# EAGLE board harp analog input v1.0 (EAGLE 9.6.2)
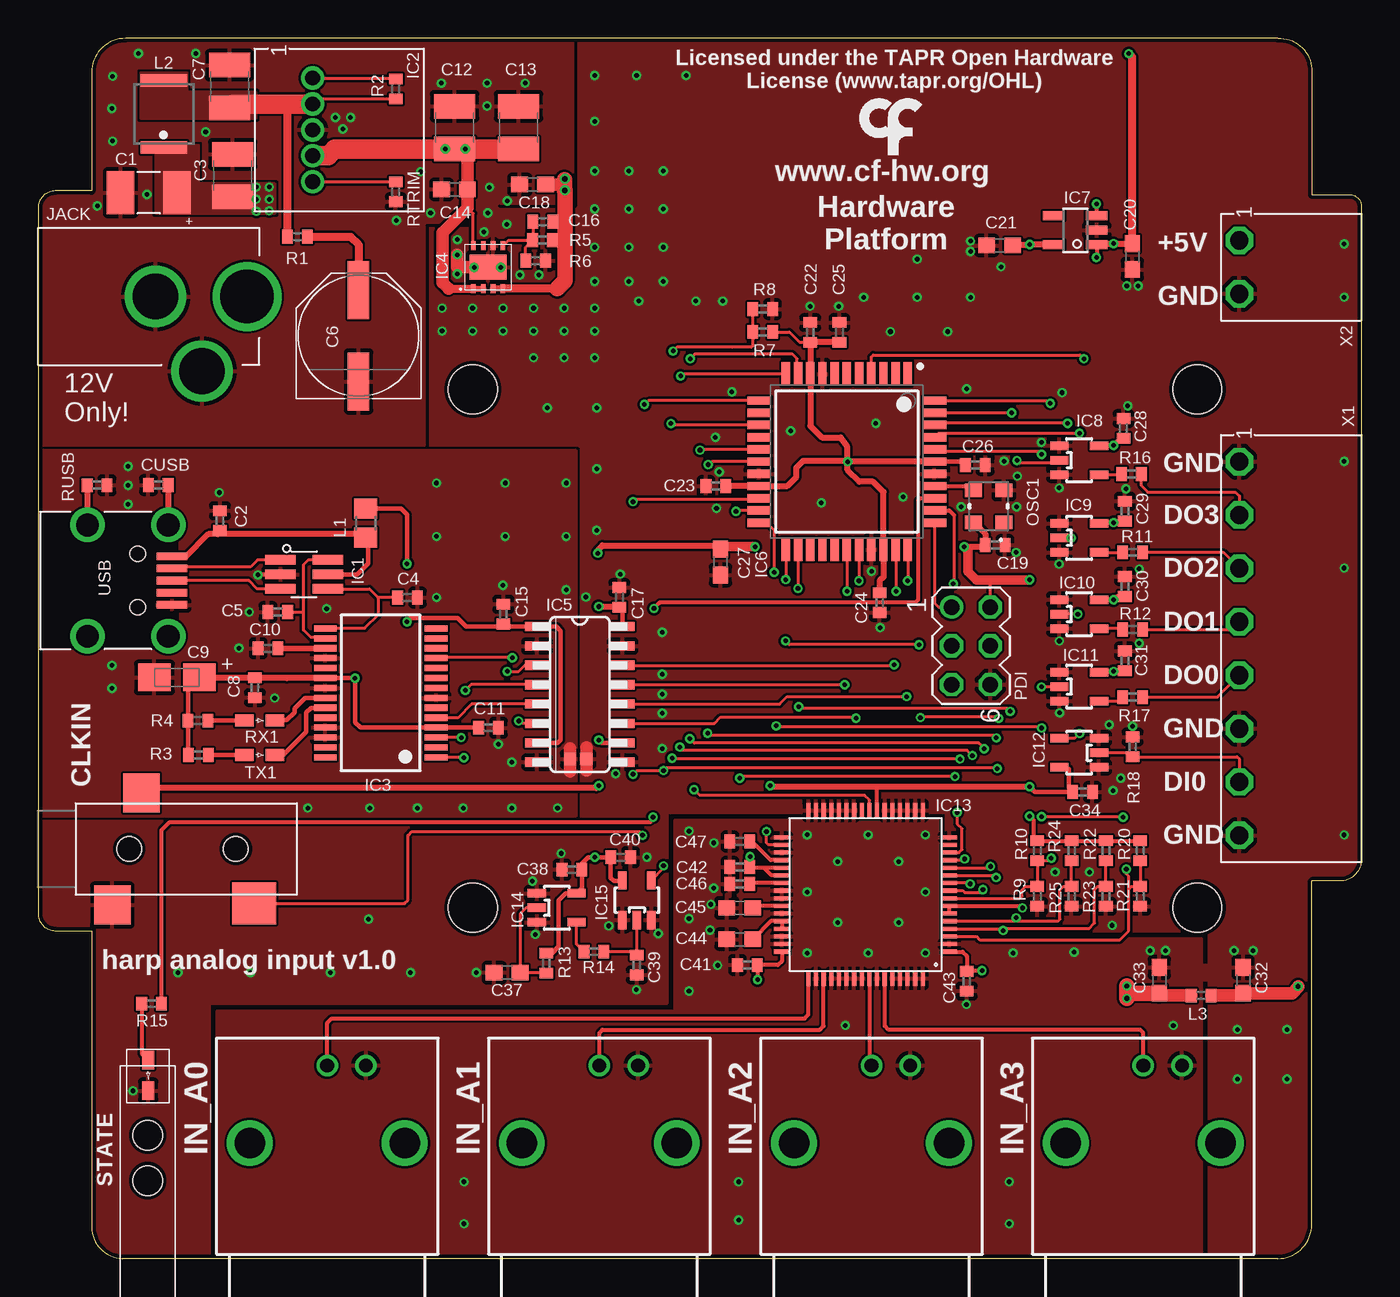
[diagram p0: board, top side]
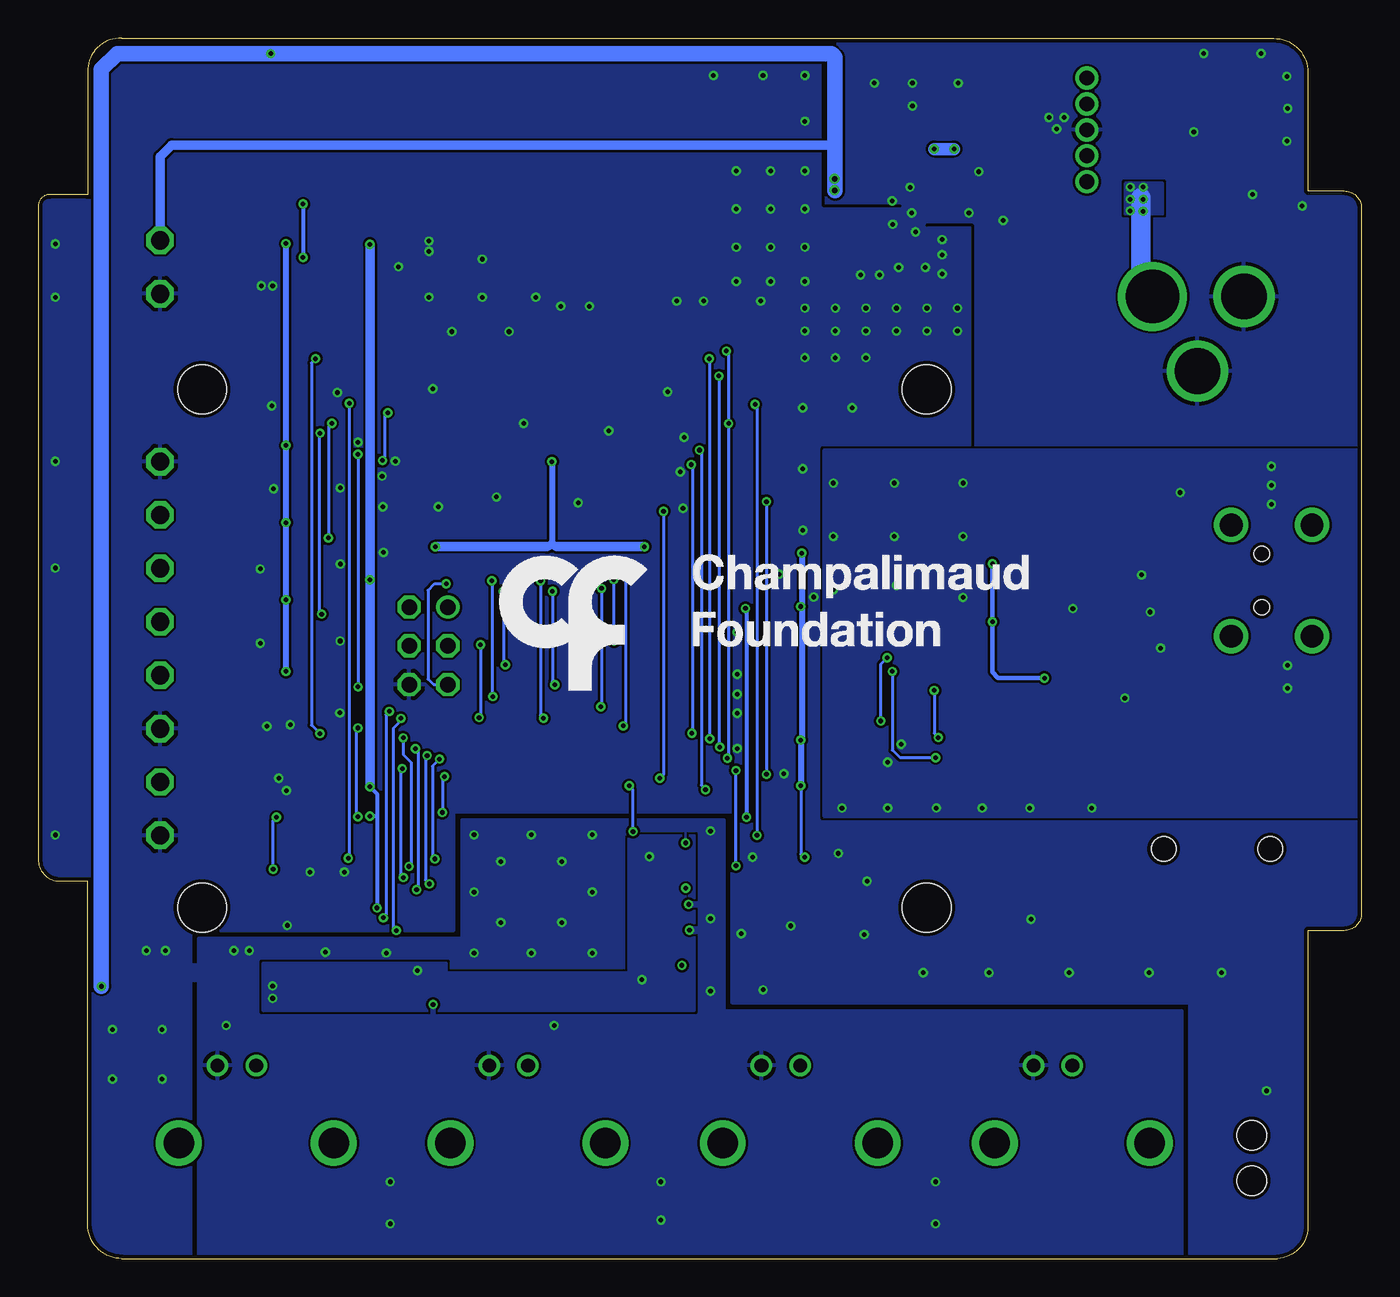
[diagram p1: board, bottom side, seen from below]

Size 86.75 x 80 mm. Coordinates in mm from the lower left corner, seen from the top.
Outline: 3.5,77.76 3.5,70 1.12,70 arc90 0,68.88 0,22.62 arc90 1.12,21.5 3.5,21.5 3.5,2.24 arc90 5.5,0 81.26,0 arc90 83.5,2.24 83.5,24.75 85.34,24.75 arc90 86.75,26.16 86.75,69 arc90 86,69.75 83.5,69.75 83.5,78 arc90 81.26,80 5.74,80 arc90 3.5,77.76
Copper layers (1*16): Top 0.035mm / dielectric 1.5mm / Bottom 0.035mm
Design rules "SeeedStudio_2layer_DRU_no_angle_20140221 *": minimum track width 6mil, minimum drill 0.29971875mm, track to track 6mil, track to pad 6mil, pad to pad 6mil, via to via 6mil, smd to smd 0mil, copper to edge 10mil, drill to drill 10mil, minimum pad ring 10mil, minimum via ring 6mil, stop-mask expansion 2mil, vias tented up to drill 100mil, thermal gap 10mil
Holes 3.2 mm at 28.5,57 28.5,23 76,57 76,23
tRestrict: 4 lines
bRestrict: 4 lines

## Footprints (pad centres in the part's own frame; a part is rotated, then mirrored left to right if it is on the bottom)
BNC_RA = drill 0.9 pad 1.27: 1 0,-5.08; 2 -2.54,-5.08 | drill 2: P$1 -5.08,0; P$2 5.08,0
CAP_100UF_HAND = smd 1.8 x 2.8: + -1.85,0; - 1.85,0
C0402 = smd 0.7 x 0.9: 1 -0.65,0; 2 0.65,0
C1210 = smd 1.6 x 2.7: 1 -1.4,0; 2 1.4,0
PANASONIC_E = smd 3.8 x 1.4: + 3,0; - -3,0
A/3216-18W = smd 2.15 x 1.8: + 1.475,0; - -1.475,0
C0603 = smd 1.1 x 1: 1 -0.85,0; 2 0.85,0
35RASMT2BHNTRX = smd 2.4 x 2.55: 1 0.8,3.675; 5 -1.1,-3.675 | smd 2.9 x 2.75: 4 8.2,-3.575 | hole 1.6: 0,0; 7,0
SOT23-6L = smd 0.6 x 2: P$1 -0.95,-1.55; P$2 0,-1.55; P$3 0.95,-1.55; P$4 0.95,1.55; P$5 0,1.55; P$6 -0.95,1.55
SIP-5 = drill 0.97 pad 1.52: P1 -3.4,0; P2 -1.7,0; P3 0,0; P4 1.7,0; P5 3.4,0
SSOP28 = smd 0.4 x 1.5: 1 -4.225,-3.625; 2 -3.575,-3.625; 3 -2.925,-3.625; 4 -2.275,-3.625; 5 -1.625,-3.625; 6 -0.975,-3.625; 7 -0.325,-3.625; 8 0.325,-3.625; 9 0.975,-3.625; 10 1.625,-3.625; 11 2.275,-3.625; 12 2.925,-3.625; 13 3.575,-3.625; 14 4.225,-3.625; 15 4.225,3.625; 16 3.575,3.625; 17 2.925,3.625; 18 2.275,3.625; 19 1.625,3.625; 20 0.975,3.625; 21 0.325,3.625; 22 -0.325,3.625; 23 -0.975,3.625; 24 -1.625,3.625; 25 -2.275,3.625; 26 -2.925,3.625; 27 -3.575,3.625; 28 -4.225,3.625
SON-8 = smd 0.3 x 0.6: P1 -0.975,-1.4; P2 -0.325,-1.4; P3 0.325,-1.4; P4 0.975,-1.4; P5 0.975,1.4; P6 0.325,1.4; P7 -0.325,1.4; P8 -0.975,1.4 | smd 2.4 x 1.65: P9 0,0
NSOIC-16 = smd 0.6 x 1.55: 1 -4.437,-2.789; 2 -3.167,-2.789; 3 -1.897,-2.789; 4 -0.627,-2.789; 5 0.643,-2.789; 6 1.913,-2.789; 7 3.183,-2.789; 8 4.453,-2.789; 9 4.453,2.811; 10 3.183,2.811; 11 1.913,2.811; 12 0.643,2.811; 13 -0.627,2.811; 14 -1.897,2.811; 15 -3.167,2.811; 16 -4.437,2.811
QFP80P1200X1200X120-44N = smd 1.55 x 0.55: 1 -5.75,4; 2 -5.75,3.2; 3 -5.75,2.4; 4 -5.75,1.6; 5 -5.75,0.8; 6 -5.75,0; 7 -5.75,-0.8; 8 -5.75,-1.6; 9 -5.75,-2.4; 10 -5.75,-3.2; 11 -5.75,-4; 23 5.75,-4; 24 5.75,-3.2; 25 5.75,-2.4; 26 5.75,-1.6; 27 5.75,-0.8; 28 5.75,0; 29 5.75,0.8; 30 5.75,1.6; 31 5.75,2.4; 32 5.75,3.2; 33 5.75,4 | smd 0.55 x 1.55: 12 -4,-5.75; 13 -3.2,-5.75; 14 -2.4,-5.75; 15 -1.6,-5.75; 16 -0.8,-5.75; 17 0,-5.75; 18 0.8,-5.75; 19 1.6,-5.75; 20 2.4,-5.75; 21 3.2,-5.75; 22 4,-5.75; 34 4,5.75; 35 3.2,5.75; 36 2.4,5.75; 37 1.6,5.75; 38 0.8,5.75; 39 0,5.75; 40 -0.8,5.75; 41 -1.6,5.75; 42 -2.4,5.75; 43 -3.2,5.75; 44 -4,5.75
TSOT23-5 = smd 0.6 x 1.408: 1 -0.95,-1.404; 2 0,-1.404; 3 0.95,-1.404; 4 0.95,1.404; 5 -0.95,1.404
SOT23-5 = smd 0.55 x 1.2: 1 -0.95,-1.3; 2 0,-1.3; 3 0.95,-1.3; 4 0.95,1.3; 5 -0.95,1.3
LQFP-64 = smd 0.27 x 1: 1 -3.75,-5.5; 2 -3.25,-5.5; 3 -2.75,-5.5; 4 -2.25,-5.5; 5 -1.75,-5.5; 6 -1.25,-5.5; 7 -0.75,-5.5; 8 -0.25,-5.5; 9 0.25,-5.5; 10 0.75,-5.5; 11 1.25,-5.5; 12 1.75,-5.5; 13 2.25,-5.5; 14 2.75,-5.5; 15 3.25,-5.5; 16 3.75,-5.5; 33 3.75,5.5; 34 3.25,5.5; 35 2.75,5.5; 36 2.25,5.5; 37 1.75,5.5; 38 1.25,5.5; 39 0.75,5.5; 40 0.25,5.5; 41 -0.25,5.5; 42 -0.75,5.5; 43 -1.25,5.5; 44 -1.75,5.5; 45 -2.25,5.5; 46 -2.75,5.5; 47 -3.25,5.5; 48 -3.75,5.5 | smd 1 x 0.27: 17 5.5,-3.75; 18 5.5,-3.25; 19 5.5,-2.75; 20 5.5,-2.25; 21 5.5,-1.75; 22 5.5,-1.25; 23 5.5,-0.75; 24 5.5,-0.25; 25 5.5,0.25; 26 5.5,0.75; 27 5.5,1.25; 28 5.5,1.75; 29 5.5,2.25; 30 5.5,2.75; 31 5.5,3.25; 32 5.5,3.75; 49 -5.5,3.75; 50 -5.5,3.25; 51 -5.5,2.75; 52 -5.5,2.25; 53 -5.5,1.75; 54 -5.5,1.25; 55 -5.5,0.75; 56 -5.5,0.25; 57 -5.5,-0.25; 58 -5.5,-0.75; 59 -5.5,-1.25; 60 -5.5,-1.75; 61 -5.5,-2.25; 62 -5.5,-2.75; 63 -5.5,-3.25; 64 -5.5,-3.75
DC_POWER_INPUT_2.1MM = drill 3.5: P1 8.5,0 | drill 3: P2 2.5,0; P3 5.55,-4.9
R0805 = smd 1.3 x 1.5: 1 -0.95,0; 2 0.95,0
IND_LPS4012 = smd 0.81 x 3.04: 1 -2.2,0; 2 2.2,0
R0402 = smd 0.7 x 0.9: 1 -0.65,0; 2 0.65,0
OSCILLATOR_3.2X2.5 = smd 0.9 x 1.1: P$1 -1.05,-1; P$2 1.05,-1; P$3 1.05,1; P$4 -1.05,1
MA03-2 = drill 1.016: 1 -2.54,-1.27 | drill 1.016 octagon: 2 -2.54,1.27; 3 0,-1.27; 4 0,1.27; 5 2.54,-1.27; 6 2.54,1.27
LED_HAND = smd 1.2 x 0.8: A -1,0; K 1,0
TP08SQ = smd 0.8 x 0.8: TP 0,0
LED_PIPE_7513D2-L = hole 1.93: -1.486,0; 1.486,0
240-0002-1 = smd 0.5 x 2: P$1 -1.6,8.65; P$2 -0.8,8.65; P$3 0,8.65; P$4 0.8,8.65; P$5 1.6,8.65 | drill 1.5: SHIELD_1 -3.65,3.1; SHIELD_2 3.65,3.1; SHIELD_3 3.65,8.4; SHIELD_4 -3.65,8.4 | hole 1: -1.75,6.4; 1.75,6.4
CON_3.5MM_1X8 = drill 1.2 octagon: P1 -12.25,0; P2 -8.75,0; P3 -5.25,0; P4 -1.75,0; P5 1.75,0; P6 5.25,0; P7 8.75,0; P8 12.25,0
CON_3.5MM_1X2 = drill 1.2 octagon: P1 -1.75,0; P2 1.75,0

## Placement (x,y rotation side)
A0  BNC  [BNC_RA]  18.95,7.58 180 top
A1  BNC  [BNC_RA]  36.79,7.58 180 top
A2  BNC  [BNC_RA]  54.64,7.58 180 top
A3  BNC  [BNC_RA]  72.45,7.58 180 top
C1  22uF  [CAP_100UF_HAND]  7.25,69.88 180 top
C2  100nF  [C0402]  11.92,48.38 90 top
C3  22uF  [C1210]  12.75,71 90 top
C4  47pF  [C0402]  24.22,43.34 0 top
C5  47pF  [C0402]  15.71,42.4 180 top
C6  100uF  [PANASONIC_E]  21,60.5 90 top
C7  22uF  [C1210]  12.55,76.85 90 top
C8  100nF  [C0402]  14.21,37.43 270 top
C9  4.7uF  [A/3216-18W]  9.09,38.11 0 top
C10  100nF  [C0402]  15.08,40.01 180 top
C11  100nF  [C0402]  29.53,34.8 0 top
C12  47uF  [C1210]  27.3,74.15 90 top
C13  47uF  [C1210]  31.5,74.15 90 top
C14  10uF  [C0603]  27.29,70.1 180 top
C15  100nF  [C0402]  30.5,42.25 90 top
C16  13pF  [C0402]  33.09,67.99 180 top
C17  100nF  [C0402]  38.11,43.34 90 top
C18  10uF  [C0603]  32.42,70.42 180 top
C19  100nF  [C0402]  62.74,46.79 0 top
C20  10uF  [C0603]  71.73,65.7 270 top
C21  10uF  [C0603]  63.03,66.42 180 top
C22  100nF  [C0402]  50.62,60.72 90 top
C23  100nF  [C0402]  44.43,50.65 180 top
C24  100nF  [C0402]  55.17,43.01 270 top
C25  330nF  [C0402]  52.53,60.72 90 top
C26  330nF  [C0402]  61.44,52.03 0 top
C27  10uF  [C0603]  44.74,45.67 270 top
C28  100nF  [C0402]  71.15,54.43 90 top
C29  100nF  [C0402]  71.25,49 90 top
C30  100nF  [C0402]  71.25,44.06 90 top
C31  100nF  [C0402]  71.25,39.19 90 top
C32  10uF  [C0603]  79,18.25 270 top
C33  10uF  [C0603]  73.5,18.25 270 top
C34  100nF  [C0402]  68.47,30.6 0 top
C37  10uF NA  [C0603]  30.75,18.75 0 top
C38  100nF NA  [C0402]  35,25.5 180 top
C39  1uF NA  [C0402]  39.25,19.25 90 top
C40  100nF NA  [C0402]  38.19,26.31 0 top
C41  100nF  [C0402]  46.5,19.25 0 top
C42  100nF  [C0402]  46,25.68 0 top
C43  100nF  [C0402]  60.88,18.19 90 top
C44  10uF  [C0603]  46,20.94 0 top
C45  10uF  [C0603]  46,23 0 top
C46  1uF  [C0402]  46,24.56 0 top
C47  1uF  [C0402]  46,27.35 0 top
CLKIN  [35RASMT2BHNTRX]  5.96,26.86 0 top
CUSB  4.7nF  [C0402]  7.88,50.72 180 top
IC1  USBLC6-2SC6  [SOT23-6L]  17.44,44.86 270 top
IC2  DC-DC-SIP-5  [SIP-5]  18,74 270 top
IC3  FT232RL  [SSOP28]  22.45,37.09 90 top
IC4  TPS78630DCQ  [SON-8]  29.5,65 0 top
IC5  SI8642BC-B-IS1  [NSOIC-16]  35.5,37 270 top
IC6  ATXMEGA128A4U-AU  [QFP80P1200X1200X120-44N]  53.02,52.25 270 top
IC7  LP5907MFX-3.3  [TSOT23-5]  67.99,67.42 90 top
IC8  SN74LVC1G125  [SOT23-5]  68.25,52.34 270 top
IC9  SN74LVC1G125  [SOT23-5]  68.25,47.25 270 top
IC10  SN74LVC1G125  [SOT23-5]  68.25,42.25 270 top
IC11  SN74LVC1G125  [SOT23-5]  68.25,37.5 270 top
IC12  SN74LVC1G125  [SOT23-5]  68.25,33.17 90 top
IC13  AD7606-4  [LQFP-64]  54.25,23.88 90 top
IC14  M74VHC1GT50DTT1G  [SOT23-5]  34,23 270 top
IC15  M74VHC1GT50DTT1G  [SOT23-5]  39.25,23.5 0 top
JACK  DC_JACK2.1MM  [DC_POWER_INPUT_2.1MM]  5.19,63.08 0 top
L1  ???  [R0805]  21.48,48.22 270 top
L2  1.5u  [IND_LPS4012]  8.25,75.05 90 top
L3  1u  [R0402]  76.25,17.25 180 top
OSC1  [OSCILLATOR_3.2X2.5]  62.31,49.32 90 top
PDI  [MA03-2]  61.16,40.18 270 top
R1  0  [R0402]  17,67 180 top
R2  NA  [R0402]  23.44,76.69 270 top
R3  2050 NA  [R0402]  10.5,33.03 180 top
R4  680 NA  [R0402]  10.48,35.27 180 top
R5  95.3k  [R0402]  33.06,66.76 0 top
R6  30.9k  [R0402]  32.61,65.43 180 top
R7  3k NA  [R0402]  47.5,60.75 0 top
R8  NA  [R0402]  47.5,62.25 180 top
R9  NA  [R0402]  65.5,23.75 90 top
R10  NA  [R0402]  65.5,26.75 90 top
R11  33  [R0402]  71.75,46.31 0 top
R12  33  [R0402]  71.75,41.25 0 top
R13  20k NA  [R0402]  33.31,19.38 270 top
R14  40.2k NA  [R0402]  36.44,20.12 0 top
R15  68  [R0402]  7.44,16.72 0 top
R16  33  [R0402]  71.68,51.43 0 top
R17  33  [R0402]  71.75,36.81 0 top
R18  100k  [R0402]  71.75,33.55 270 top
R20  NA  [R0402]  72.25,26.75 90 top
R21  NA  [R0402]  72.25,23.75 90 top
R22  NA  [R0402]  70,26.75 90 top
R23  NA  [R0402]  70,23.75 90 top
R24  NA  [R0402]  67.75,26.75 90 top
R25  NA  [R0402]  67.75,23.75 90 top
RTRIM  243  [R0402]  23.45,69.95 90 top
RUSB  1M  [R0402]  3.87,50.7 0 top
RX1  GREEN NA  [LED_HAND]  14.53,35.27 0 top
STATE  GREEN  [LED_HAND]  7.21,12.01 270 top
TP1  TPTP08SQ  [TP08SQ]  34.88,32.75 0 top
TP2  TPTP08SQ  [TP08SQ]  35.94,32.75 0 top
TX1  RED NA  [LED_HAND]  14.53,33.03 0 top
U$2  [LOGO_5]  53.43,42.97 0 bottom
U$3  [LED_PIPE_7513D2-L]  7.19,6.6 90 top
U$4  [LOGO_7]  55.08,74.78 0 top
USB  [240-0002-1]  0.13,44.46 270 top
X1  CON_3.5MM_1X8  [CON_3.5MM_1X8]  78.75,40 270 top
X2  CON_3.5MM_1X2  [CON_3.5MM_1X2]  78.75,65 270 top

## Library data of the parts
A0 A1-A3 CLKIN IC2 USB X1 X2 = CNP-connectors
C1 JACK L2 OSC1 RX1 STATE TX1 U$2-U$4 = CNP-miscellaneous
C2-C34 C37-C47 CUSB L1 L3 R1-R18 R20-R25 RTRIM RUSB = rcl
IC1 = CNP 2
IC3 = ftdichip; MPN: FT232RL; OC_FARNELL: 1146032; OC_NEWARK: 91K9918
IC4 IC13 = CNP-ics 1
IC5 = CNP-ics 2
IC6 = xmega-a4
IC7 = CNP
IC8-IC12 IC14 IC15 = My_library 0v2
PDI = con-lstb; OC_FARNELL: unknown; OC_NEWARK: unknown
TP1 TP2 = testpad

## Nets
3V3OUT: C10.1 IC3.17
!CS_ADC: IC6.14 IC13.13 R7.1 R8.2
+5V: C16.1 C18.1 C20.1 C28.1 C29.1 C30.1 C31.1 C32.2 IC4.P3 IC4.P4 IC7.1 IC7.3 IC8.5 IC9.5 IC10.5 IC11.5 L3.1 R5.2 X2.P1
+12V: C1.+ C3.1 JACK.P1 L2.1
A0: A0.1 IC13.49
A1: A1.1 IC13.51
A2: A2.1 IC13.57
A3: A3.1 IC13.59
A5V: C33.2 C41.2 C42.2 C43.2 IC13.1 IC13.37 IC13.38 IC13.48 L3.2
BUSY: IC6.21 IC13.14
CLK_SYNC: CLKIN.4 IC6.12
CONVSTA: IC6.10 IC13.9
CONVSTB: IC6.11 IC13.10
CTS: IC5.11 IC6.29
DCIN: C7.1 IC2.P2 L2.2 R1.2 R2.2
DI0: IC12.2 R18.2 X1.P7
DO0: R17.2 X1.P5
DO1: R12.2 X1.P4
DO2: R11.2 X1.P3
DO3: R16.2 X1.P2
FT_CTS: IC3.11 IC5.6
FT_RTS: IC3.3 IC5.4
FT_RXD: IC3.5 IC5.5
FT_TXD: IC3.1 IC5.3
GND: A0.2 A1.2 A2.2 A3.2 C1.- C3.2 C6.- C7.2 C12.2 C13.2 C14.2 C17.2 C18.2 C19.2 C20.2 C21.2 C22.2 C23.2 C24.2 C25.2 C26.2 C27.2 C28.2 C29.2 C30.2 C31.2 C32.1 C33.1 C34.2 C37.1 C38.2 C39.1 C40.2 C41.1 C42.1 C43.1 C44.1 C45.1 C46.1 C47.1 CLKIN.5 IC2.P3 IC4.P6 IC4.P9 IC5.9 IC5.15 IC6.8 IC6.18 IC6.30 IC6.38 IC7.2 IC8.1 IC8.3 IC9.1 IC9.3 IC10.1 IC10.3 IC11.1 IC11.3 IC12.1 IC12.3 IC13.2 IC13.16 IC13.17 IC13.18 IC13.19 IC13.20 IC13.21 IC13.22 IC13.26 IC13.27 IC13.28 IC13.29 IC13.30 IC13.31 IC13.32 IC13.33 IC13.35 IC13.40 IC13.41 IC13.43 IC13.46 IC13.47 IC13.50 IC13.52 IC13.53 IC13.54 IC13.55 IC13.56 IC13.58 IC13.60 IC13.61 IC13.62 IC13.63 IC13.64 IC14.1 IC14.3 IC15.1 IC15.3 JACK.P2 JACK.P3 OSC1.P$2 PDI.6 R6.1 R8.1 R9.1 R18.1 R21.1 R23.1 R25.1 RTRIM.1 STATE.K TP2.TP X1.P1 X1.P6 X1.P8 X2.P2
GND2: C2.2 C4.2 C5.2 C8.2 C9.- C10.2 C11.2 C15.2 CUSB.2 IC1.P$2 IC3.7 IC3.18 IC3.21 IC3.25 IC3.26 IC5.2 IC5.8 RUSB.2 TP1.TP USB.P$5
IN00: IC6.4 IC12.4
N$2: IC9.4 R11.1
N$3: IC10.4 R12.1
N$4: IC11.4 R17.1
N$5: R4.1 RX1.A
N$7: IC3.22 RX1.K
N$11: IC8.4 R16.1
N$12: IC2.P5 RTRIM.2
N$13: IC1.P$3 USB.P$3
N$15: CUSB.1 USB.SHIELD_4
N$16: IC2.P1 R2.1
N$20: C16.2 IC4.P5 R5.1 R6.2
N$23: R15.1 STATE.A
N$24: C6.+ R1.1
N$36: C47.2 IC13.36
N$37: C46.2 IC13.39
N$38: C45.2 IC13.42
N$39: C44.2 IC13.44 IC13.45
N$40: C37.2 IC14.2 R13.2
N$41: IC14.4 R14.1
N$43: C39.2 IC15.2 R14.2
N$60: C2.1 IC1.P$5 L1.2 USB.P$1
N$401: R3.1 TX1.A
N$591: IC3.23 TX1.K
N$601: RUSB.1 USB.SHIELD_1
N$701: IC1.P$1 USB.P$2
OS0: IC6.22 IC13.3 R20.1 R21.2
OS1: IC6.23 IC13.4 R22.1 R23.2
OS2: IC6.24 IC13.5 R24.1 R25.2
OSC1: IC6.37 OSC1.P$3
OUT0: IC6.40 IC11.2
OUT1: IC6.41 IC10.2
OUT2: IC6.42 IC9.2
OUT3: IC6.43 IC8.2
P5.45V: C12.1 C13.1 C14.1 IC2.P4 IC4.P1 IC4.P2 IC4.P8
PDI-CLK: IC6.35 PDI.5
PDI-DATA: IC6.34 PDI.1
RANGE: IC6.44 IC13.8 R9.2 R10.1
RESET: IC6.20 IC13.11 IC15.4
RTS: IC5.13 IC6.28
RXD: IC5.12 IC6.33
SCK0: IC6.17 IC13.12
SDI: IC6.15
SDO: IC6.16 IC13.24
STATE: IC6.36 R15.2
TXD: IC5.14 IC6.32
USB5V: C8.1 C9.+ C11.1 C15.1 IC3.4 IC3.20 IC5.1 IC5.7 L1.1 R3.2 R4.2
USBDM: C5.1 IC1.P$6 IC3.16
USBDP: C4.1 IC1.P$4 IC3.15
VCCIO: C17.1 C19.1 C21.1 C22.1 C23.1 C24.1 C25.1 C26.1 C27.1 C34.1 C38.1 C40.1 CLKIN.1 IC5.10 IC5.16 IC6.9 IC6.19 IC6.31 IC6.39 IC7.5 IC12.5 IC13.6 IC13.7 IC13.23 IC13.34 IC14.5 IC15.5 OSC1.P$4 PDI.2 R7.2 R10.2 R13.1 R20.2 R22.2 R24.2

## Tracks (layer width: path | path; a pad name or v marks a point on that pad's centre or on a via)
3V3OUT
  Top 0.305: 16.04,40.01 C10.1
  Top 0.356: IC3.17 16.04,40.01
!CS_ADC  (via drill 0.3, 0.3 pad 0.6)
  Top 0.203: v41.62,59.5 41.88,59.75 45.5,59.75 46.75,59.75 46.85,59.85 46.85,60.25 | 46.85,60.25 46.85,60.5 | 46.85,60.5 R7.1 | IC13.13 60.66,26.12 v60.74,26.2 | v60.44,32.75 60.42,32.77 41.61,32.77 v41.56,32.81 | IC6.14 41.6,54.65 41.5,54.75 v41.48,54.75 | R7.1 R8.2 R7.1 | R7.1 46.85,60.5 | R7.1 46.85,60.25
  Bottom 0.203: v41.62,59.5 41.48,59.36 v41.48,54.75 41.48,32.9 41.56,32.82 v41.56,32.81 | v60.44,32.75 60.9,32.29 60.9,26.36 v60.74,26.2
+5V  (via drill 0.3, 0.3 pad 0.6, 0.35)
  Top 0.203: v34.54,70.04 v34.54,70.79 | C16.1 34.54,68 | R5.2 34.52,66.76 34.54,66.75
  Top 0.254: IC7.3 69.4,69.13 v69.38,69.14 | IC7.1 69.4,65.72 v69.38,65.64
  Top 0.305: C29.1 71.15,48.25 v70.5,48.25 69.6,48.25 IC9.5 | C31.1 70.54,38.54 v70.5,38.5 69.6,38.5 IC11.5 | C28.1 70.96,53.78 v70.5,53.31 69.5,53.31 IC8.5 | IC10.5 70.49,43.2 v70.5,43.19 70.72,43.41 C30.1
  Top 0.406: IC7.1 69.47,66.55 v70.5,66.55 C20.1 | IC4.P4 IC4.P3
  Top 0.508: IC4.P4 30.49,63.58 34.02,63.58 | C20.1 71.73,78.77 v71.5,79
  Top 0.813: L3.1 79,17.25 C32.2 82.21,17.4 82.62,17.81 82.62,17.82 v82.6,17.85 | v34.54,70.79 34.17,70.42 C18.1 34.16,70.42 v34.54,70.04
  Top 1.016: v34.54,70.04 34.54,68 34.54,66.75 34.54,64.1 34.02,63.58 | 34.5,70 34.5,70.75 34.5,70
  Bottom 0.254: v69.38,65.64 | v69.38,69.14 v69.38,65.64
  Bottom 0.305: 34.5,70 v34.54,70.04
  Bottom 0.406: v70.5,38.5 v70.5,43.19 v70.5,48.25 v70.5,53.31 v70.5,66.55
  Bottom 0.61: X2.P1 78.75,72.25 78,73 34.5,73
  Bottom 1.016: v82.6,17.85 82.6,77.96 81.56,79 v71.5,79 34.75,79 34.5,78.75 34.5,73 34.5,70
+12V  (via drill 0.3 pad 0.6)
  Bottom 1.27: 14.44,69.56 14.44,63.83 JACK.P1
  other vias: 15.15,70.25 14.3,70.25 15.15,69.45 14.3,69.45 15.15,68.7 14.31,68.67
  pour Top (no thermals): 7.75,68.5 7.75,73 10.5,73 10.5,70.5 15.5,70.5 15.5,68.5
  pour Bottom (no thermals): 13,70.5 15.5,70.5 15.5,68.5 13,68.5
A0
  Top 0.254: A0.1 18.95,15.45 19.25,15.75 50.25,15.75 50.5,16 IC13.49
A1
  Top 0.254: A1.1 36.79,14.79 37,15 51.25,15 51.5,15.25 IC13.51
A2
  Top 0.254: IC13.57 54.5,12.79 A2.1
A3
  Top 0.254: A3.1 72.45,14.8 72.25,15 55.75,15 55.5,15.25 IC13.59
A5V  (via drill 0.3, 0.3 pad 0.6)
  Top 0.254: IC13.1 60.59,20.12 60.88,19.84 C43.2 | v61.88,18.88 60.91,18.88 C43.2 | C43.2 | v47.16,18.29 47.15,18.3 C41.2 48.5,19.25 48.75,19.5 IC13.48 | v46.67,26.35 46.65,26.32 C42.2 46.7,25.62 47.58,25.62 | IC13.37 47.58,25.62 | IC13.38 48.08,25.12 47.58,25.62
  Top 0.813: L3.2 73.5,17.25 C33.2
  Top 1.016: C33.2 71.38,17.4 v71.38,17.88 v71.38,17.06
  pour Bottom (no thermals): 43.75,27.75 43.75,16.25 72,16.25 72,19.38 60,19.38 60,18.75 48,18.75 48,27.75
BUSY  (via drill 0.3 pad 0.6)
  Top 0.203: IC6.21 45.8,49.05 v45.75,49 | IC13.14 60.38,26.62 60.56,26.81 60.56,28.19 60.25,28.5 v60.25,29.25 | v60.11,31.6 46.1,31.6 v46,31.5
  Bottom 0.203: v45.75,49 45.75,31.75 v46,31.5 | v60.11,31.6 60.25,31.46 v60.25,29.25
CLK_SYNC  (via drill 0.3 pad 0.6)
  Top 0.203: v39.75,56 40,56.25 IC6.12 | CLKIN.4 24.03,23.28 24.25,23.5 24.25,27.75 24.5,28 39.44,28 39.62,27.81 v39.62,27.75
  Bottom 0.203: v39.75,56 39.62,55.88 v39.62,27.75
CONVSTA  (via drill 0.3)
  Top 0.203: IC13.9 60.62,24.12 60.75,24 61.75,24 v61.94,24.19 | v62.03,33.44 61.66,33.8 43.01,33.8 v42.71,34.09 | IC6.10 49.75,58.07 49.75,59 49.45,59.31 43.06,59.31 v42.75,59
  Bottom 0.203: v61.94,24.19 61.86,24.27 61.86,33.27 v62.03,33.44 | v42.71,34.09 42.72,34.1 42.72,58.88 42.75,58.91 v42.75,59
CONVSTB  (via drill 0.3)
  Top 0.203: v61.09,24.57 61.04,24.62 IC13.10 | v61.25,32.98 60.9,33.33 42.17,33.33 42.07,33.43 v42.07,33.54 | IC6.11 42.36,58 42.17,57.81 v42.12,57.87
  Bottom 0.203: v61.09,24.57 61.35,24.82 61.35,32.88 v61.25,32.98 | v42.07,33.54 42.07,57.82 v42.12,57.87
CTS  (via drill 0.3 pad 0.6)
  Top 0.203: IC6.29 53.82,44.69 53.81,44.69 v53.81,44.44 | IC5.11 44.34,35.09 44.75,35.5 53.55,35.5 v53.62,35.43
  Bottom 0.203: v53.81,44.44 53.81,35.62 v53.62,35.43
DCIN
  Top 0.203: IC2.P2 18.34,76.04 R2.2
  Top 0.305: 16.35,75.55 16.5,75.7
  Top 0.508: R1.2 16.35,75.55
  Top 1.27: IC2.P2 16.5,75.7 12.8,75.7 C7.1
  pour Top (no thermals): 14.25,76.5 14.25,74.75 6.75,74.75 6.75,77.75 9.75,77.75 9.75,76.5
DI0
  Top 0.203: X1.P7 78.75,32.75 78.6,32.9 R18.2 71.48,33.17 IC12.2
DO0
  Top 0.203: X1.P5 77.31,36.81 R17.2
DO1
  Top 0.203: X1.P4 78.25,41.25 R12.2
DO2
  Top 0.203: R11.2 77.69,46.31 X1.P3
DO3
  Top 0.203: X1.P2 78.75,50 78.5,50.25 72.75,50.25 72.33,50.67 R16.2
FT_CTS  (via drill 0.3 pad 0.6)
  Top 0.203: IC5.6 31.66,35.09 v31.5,35.25 | v31.08,39.4 26.11,39.4 IC3.11
  Bottom 0.203: v31.5,35.25 31.5,38.98 v31.08,39.4
FT_RTS  (via drill 0.3 pad 0.6)
  Top 0.203: IC5.4 28.38,37.63 v28,37.25 | v27.73,34.16 IC3.3
  Bottom 0.203: v28,37.25 28,34.43 v27.73,34.16
FT_RXD
  Top 0.203: IC5.5 28.43,36.36 27.53,35.46 26.1,35.46 26.09,35.46
  Top 0.406: 26.09,35.46 IC3.5
FT_TXD  (via drill 0.3 pad 0.6)
  Top 0.203: v27.91,32.84 26.1,32.84 | v30.75,38.5 31.5,38.5 32,39 32.61,39 IC5.3
  Top 0.254: 26.1,32.84 IC3.1
  Bottom 0.203: v30.75,38.5 30.75,33.35 30.25,32.84 v27.91,32.84
GND  (via drill 0.3 pad 0.6)
  Top 0.813: 35.94,33.5 35.94,32 | IC4.P9 27.5,65 27.48,65.02 v27.48,65.81
  other vias: 4.88,77.51 4.88,73.26 10.98,73.86 10.33,79.01 6.58,79.01 28.48,62.31 30.48,62.31 30.48,60.81 28.48,60.81 32.48,62.31 32.48,60.81 27.48,64.56 26.48,62.31 26.48,60.81 19.48,74.81 20.48,74.81 19.98,74.06 4.83,75.41 25.08,71.26 29.43,75.56 29.43,77.06 26.43,77.06 36.61,47.75 54.92,54.76 51.35,49.55 49.33,54.27 56.7,49.93 50.61,62.44 44.4,53.84 44.47,49.19 64.12,46.3 64.2,51.3 37.86,31.79 63.33,52.28 60.52,49.28 64.14,49.28 34.48,62.31 34.48,60.81 31.93,77.06 52.48,62.44 71.37,63.78 72.12,63.78 55.2,41.37 54.64,45.06 61.12,66.71 61.12,66.03 45.48,56.83 40.91,41.06 40.91,38.31 40.91,37 40.91,35.75 40.91,33.44 39.91,26.31 35.91,43.37 79.66,20.19 78.41,20.19 72.91,20.19 73.91,20.19 60.86,16.66 44.55,19.22 44.3,27.25 44.11,23.22 44.05,21.54 44.3,24.29 85.62,66.53 85.62,63.03 85.62,52.28 85.62,45.28 85.62,27.78 39.23,77.56 42.48,77.56 36.48,77.56 34.48,59.06 32.48,59.06 37.41,21.81 40.66,21.31 39.22,17.62 28.72,18.75 34.29,26.56 32.6,21.25 32.41,24.75 24.41,18.75 19.16,18.75 13.91,18.75 21.66,22.25 9.16,18.75 6.22,11 70.47,30.69 70.97,31.5 55.87,60.78 59.62,60.78 57.62,63.03 63.12,65.03 57.62,65.53 61.12,63.03 54.12,63.03 44.87,62.78 43.12,62.78 39.37,62.78 36.62,55.78 33.37,55.78 36.62,51.78 60.87,57.03 67.12,56.78 78.62,15.03 81.87,15.03 81.87,11.78 78.62,11.78 50.42,27.79 58.17,27.79 58.17,20.04 50.42,20.04 50.42,24.04 58.17,24.04 54.42,27.79 54.42,20.04 52.42,22.04 52.42,26.04 56.42,26.04 56.42,22.04 63.92,20.04 67.92,20.1 45.92,5.04 45.92,2.54 63.67,5.04 63.67,2.29 27.92,5.04 27.92,2.29 42.67,17.54 42.67,28.04 42.67,22.29 52.92,15.29 74.42,15.29 70.22,35 65.78,53.51 66.94,50.53 66.93,45.54 66.95,40.49 66.97,35.78 71.44,55.9 71.31,50.46 72.19,45.21 72.19,40.34 71.75,34.9 38.16,44.87 44.65,51.59 70.42,21.85 68.92,25.35 66.67,25.35 30.76,69.35 29.59,70.24 32.84,64.49 30.34,64.99 28.59,64.99 27.48,66.81 36.48,62.31 36.48,60.81 36.48,64.06 38.73,64.06 38.73,66.31 38.73,68.81 40.98,68.81 40.98,66.31 40.98,64.06 36.48,66.31 36.48,68.81 36.48,71.31 38.73,71.31 40.98,71.31 36.48,74.56 36.48,59.06 29.48,68.56 30.73,67.81 29.23,67.31 25.73,68.56 23.48,68.06 31.59,64.49 3.88,69.01 7.13,69.76
  pour Bottom (rank 2): 3.5,0 11.25,0 11.25,16.75 41.25,16.75 41.25,29.25 59.5,29.25 59.5,21.5 76.75,21.5 76.75,0 83.5,0 83.5,24.75 86.75,24.75 86.75,69.75 83.5,69.75 83.5,80 3.5,80 3.5,70 0,70 0,21.5 3.5,21.5
  pour Top (rank 2): 0,21.5 3.5,21.5 3.5,0 11.25,0 11.25,16.75 41.25,16.75 41.25,29.25 59.5,29.25 59.5,21.5 76.75,21.5 76.75,0 83.5,0 83.5,24.75 86.75,24.75 86.75,69.75 83.5,69.75 83.5,80 3.5,80 3.5,70 0,70
  pour Top: 11.75,16.25 41.75,16.25 41.75,28.75 59,28.75 59,21 76.25,21 76.25,19.25 77.25,19.25 77.25,18.25 76.25,18.25 76.25,0 11.75,0
  pour Bottom (rank 2): 11.75,16.25 41.75,16.25 41.75,28.75 59,28.75 59,21 76.25,21 76.25,19.25 77.25,19.25 77.25,18.25 76.25,18.25 76.25,0 11.75,0
GND2  (via drill 0.3 pad 0.6)
  Top 0.305: IC1.P$2 14.44,44.86 v14.4,44.82
  Top 0.813: 34.88,33.44 34.88,31.94
  other vias: 5.9,51.95 5.9,50.7 5.9,49.45 11.87,50.22 13.84,42.39 4.84,38.89 4.84,37.39 13.17,40.02 15.5,36.75 26.12,43.35 18.91,42.62 30.16,33.73 26.12,47.35 26.12,50.85 30.62,50.85 34.62,50.85 34.62,47.35 30.62,47.35 30.47,44.15 34.62,43.85 31.05,32.54 31.05,29.54 34.05,29.54 24.86,29.54 27.86,29.54 17.68,29.54 21.74,29.54
  pour Top: 0,53 35.25,53 35.25,29 0,29
  pour Bottom: 0,53 35.25,53 35.25,29 0,29
IN00  (via drill 0.3 pad 0.6)
  Top 0.203: v68.27,34.42 67.97,34.12 IC12.4 | IC6.4 54.62,59.12 54.75,59.25 68.31,59.25 v68.56,59
  Bottom 0.203: v68.27,34.42 68.83,34.98 68.83,58.73 v68.56,59
N$2
  Top 0.203: IC9.4 71.09,46.3 R11.1
N$3
  Top 0.203: R12.1 71.05,41.3 IC10.4
N$4
  Top 0.203: IC11.4 70.84,36.55 R17.1
N$5
  Top 0.305: RX1.A R4.1
N$7
  Top 0.305: IC3.22 17.52,36.76 16.82,36.06 16.82,35.81 16.31,35.3 15.55,35.3 RX1.K
N$11
  Top 0.203: IC8.4 70.99,51.39 R16.1
N$12
  Top 0.203: IC2.P5 RTRIM.2
N$13
  Top 0.203: IC1.P$3 14.35,43.91 13.82,44.44 8.8,44.44
  Top 0.305: 8.8,44.44 USB.P$3
N$15
  Top 0.305: 8.51,48.13 USB.SHIELD_4
  Top 0.406: CUSB.1 8.51,48.13
N$16
  Top 0.203: IC2.P1 23.38,77.4 R2.1
N$20
  Top 0.203: IC4.P5 30.84,66.76 R5.1 | C16.2 32.44,66.79 R5.1 | R6.2 31.96,66.32 R5.1
N$23
  Top 0.254: R15.1 6.79,13.43 STATE.A
N$24
  Top 0.508: R1.1 20.5,67 21,66.5 C6.+
N$36
  Top 0.254: IC13.36 48.74,26.13 48.03,26.13 46.81,27.35 C47.2
N$37
  Top 0.254: IC13.39 46.71,24.62 C46.2
N$38
  Top 0.254: IC13.42 46.98,23.12 C45.2
N$39
  Top 0.254: C44.2 48.04,22.12 IC13.44 IC13.45
N$40
  Top 0.203: IC14.2 32,23 31.6,22.6 C37.2 33.29,18.75 R13.2
N$41
  Top 0.203: R14.1 35.3,20.61 IC14.4
N$43
  Top 0.203: IC15.2 C39.2 39.23,20.12 R14.2
N$60
  Top 0.305: IC1.P$5 20.92,44.86 21.64,45.59 21.64,46.86 21.01,47.49 21.49,47.49 L1.2 | 9.66,45.99 8.83,46.01 USB.P$1 | C2.1 11.92,47.62
  Top 0.406: 21.01,47.49 11.79,47.49 | 11.79,47.49 11.16,47.49 9.66,45.99 | 11.92,47.62 11.79,47.49
N$401
  Top 0.305: TX1.A R3.1
N$591
  Top 0.305: IC3.23 17.89,36.11 17.58,35.81 17.58,34.54 16.05,33.01 15.54,33.01 TX1.K
N$601
  Top 0.305: 3.22,48.12 USB.SHIELD_1
  Top 0.406: RUSB.1 3.22,48.12
N$701
  Top 0.203: IC1.P$1 14.39,45.81 13.92,45.34 8.87,45.34
  Top 0.305: 8.87,45.34 USB.P$2
OS0  (via drill 0.3 pad 0.6)
  Top 0.203: IC13.3 61.5,21.12 61.75,20.88 70.88,20.88 71.5,21.5 71.5,24.25 | 71.5,24.25 71.65,24.4 R21.2 R20.1 | IC6.22 47.75,48.25 48.25,47.75 v48.25,45 | 71.5,24.25 71.5,25.06 71.19,25.38 v71.34,25.53 | v71.12,28.94 71.09,28.97 v65.79,28.97 | v48.39,34.93 48.47,34.85 65.73,34.85 v65.79,34.79
  Bottom 0.203: v71.34,25.53 71.34,28.72 v71.12,28.94 | v48.39,34.93 48.25,35.06 v48.25,45 | v65.79,34.79 65.89,34.69 65.89,29.07 v65.79,28.97
OS1  (via drill 0.3 pad 0.6)
  Top 0.203: R22.1 R23.2 69.97,24.38 69.44,24.38 69.25,24.19 69.25,22 68.88,21.62 63.27,21.62 | IC6.23 v49.02,44.52 | IC13.4 63.27,21.62 | 63.27,21.62 v63.27,21.52 | v62.97,35.42 62.88,35.51 57.88,35.51 v57.84,35.47 | v57.75,40.25 49.25,40.25 v49,40.5
  Bottom 0.203: v63.27,21.52 63.3,21.52 63.47,21.68 63.47,34.77 62.97,35.27 v62.97,35.42 | v57.75,40.25 57.75,35.64 57.84,35.55 v57.84,35.47 | v49,40.5 49.02,40.52 v49.02,44.52
OS2  (via drill 0.3 pad 0.6)
  Top 0.203: IC13.5 64.12,22.12 | 64.12,22.12 66.88,22.12 67,22.25 67,24.19 67.19,24.38 67.72,24.38 R25.2 R24.1 | v49.81,43.94 v49.82,43.94 IC6.24 | 64.12,22.12 v64.12,22.34 | v63.73,35.87 63.53,36.08 49.97,36.08 v49.86,36.19
  Bottom 0.203: v64.12,22.34 63.94,22.52 63.94,35.66 v63.73,35.87 | v49.86,36.19 49.81,36.24 v49.81,43.94
OSC1
  Top 0.152: 61.04,50.65 OSC1.P$3
  Top 0.254: IC6.37 61.04,50.65
OUT0  (via drill 0.3)
  Top 0.203: IC6.40 58.88,52.94 65.57,52.94 v65.78,52.72 | v65.78,37.48 65.8,37.5 IC11.2
  Bottom 0.203: v65.78,52.72 65.78,37.53 65.67,37.42 65.71,37.42 v65.78,37.48
OUT1  (via drill 0.3)
  Top 0.203: v68.17,42.26 68.16,42.25 IC10.2 | v68.27,54.12 68.27,54.08 58.99,54.08 IC6.41
  Bottom 0.203: v68.17,42.26 68.33,42.42 68.33,54.06 v68.27,54.12
OUT2  (via drill 0.3 pad 0.6)
  Top 0.203: IC6.42 58.9,54.79 67.47,54.79 v67.5,54.76 | IC9.2 v67.72,47.25
  Bottom 0.203: v67.72,47.25 67.7,47.26 67.7,54.53 67.5,54.74 v67.5,54.76
OUT3  (via drill 0.3, 0.3 pad 0.6)
  Top 0.203: IC6.43 v63.83,55.45 | v64.17,52.33 64.36,52.14 66.75,52.14 IC8.2
  Bottom 0.203: v63.83,55.45 64.03,55.25 64.03,52.47 v64.17,52.33
P5.45V  (via drill 0.3 pad 0.6)
  Top 0.203: IC4.P8 28.52,68.51 28.14,68.89
  Top 0.406: IC4.P1 IC4.P2
  Top 0.508: 26.9,63.6 IC4.P1
  Top 0.813: C12.1 v26.7,72.75 | 26.9,63.6 26.5,64 26.5,67.25 28.14,68.89 C14.1 28.14,72.64 28.25,72.75
  Top 1.27: C13.1 28.25,72.75 v26.7,72.75 | v28,72.75 C12.1 19.45,72.75 19,72.3 IC2.P4
  Bottom 0.813: v28,72.75 v26.7,72.75
PDI-CLK  (via drill 0.3 pad 0.6)
  Top 0.203: 60.05,48.74 60.05,44.3 v60,44.25
  Top 0.254: IC6.35 59.73,49.05 60.05,48.74
  Bottom 0.203: PDI.5 60.82,37.63 61.19,38 61.19,43.81 60.75,44.25 v60,44.25
PDI-DATA
  Top 0.203: IC6.34 58.77,42.98 59.03,42.72 PDI.1
RANGE  (via drill 0.3)
  Top 0.203: IC13.8 64.38,23.62 64.5,23.75 64.5,24.19 64.69,24.38 65.47,24.38 R9.2 R10.1 66.27,26.1 v66.42,26.25 | IC6.44 66.14,56.25 66.32,56.07 v66.35,56.07
  Bottom 0.203: v66.35,56.07 66.35,26.32 v66.42,26.25
RESET  (via drill 0.3 pad 0.6)
  Top 0.203: IC13.11 62.67,25.12 v62.8,24.99 | IC15.4 41,25.6 v41,25.75 | v62.88,32.13 62.84,32.17 41.17,32.17 v41,32 39.25,32 v39,31.75 | IC6.20 47.17,49.75 39.12,49.75 v39,49.62
  Bottom 0.203: v62.8,24.99 63,25.18 63,32.01 v62.88,32.13 | v41,25.75 v41,32 | v39,49.62 v39,31.75
RTS  (via drill 0.3 pad 0.6)
  Top 0.203: IC6.28 53.02,43.77 53,43.75 v53.03,43.75 | IC5.13 v52.88,37.63
  Bottom 0.203: v52.88,37.63 52.85,37.66 53.03,37.84 v53.03,43.75
RXD  (via drill 0.3 pad 0.6)
  Top 0.203: IC6.33 57.02,44.46 v57,44.44 | IC5.12 48.61,36.36 49.1,36.85 v56.94,36.85
  Bottom 0.203: v57,44.44 57,37.09 56.94,37.03 v56.94,36.85
SCK0  (via drill 0.3 pad 0.6)
  Top 0.203: v43.93,52.06 43.98,52.06 44.17,52.25 IC6.17 | v62.82,34.14 62.66,34.3 44.04,34.3 v43.89,34.45 | IC13.12 62.3,25.62 62.3,25.63 62.35,25.63 v62.43,25.71
  Bottom 0.203: v62.82,34.14 62.82,33.04 62.3,32.52 62.3,25.89 62.43,25.75 v62.43,25.71 | v43.93,52.06 43.84,51.96 43.84,34.5 v43.89,34.45
SDO  (via drill 0.3 pad 0.6)
  Top 0.203: v43.39,53.01 43.43,53.05 IC6.16 | IC13.24 54.5,30.06 54.19,30.38 43.38,30.38 v43,30.75
  Bottom 0.203: v43.39,53.01 43.27,52.89 43.27,31.02 v43,30.75
STATE  (via drill 0.3 pad 0.6)
  Top 0.203: 40.31,28.81 v40.31,28.94
  Top 0.254: R15.2 8.09,28.09 8.62,28.62 40.12,28.62 40.31,28.81 | v40.38,42.62 40.75,43 57.5,43 57.69,43.19 57.69,49.69 57.85,49.85 IC6.36
  Bottom 0.203: v40.38,42.62 40.31,42.56
  Bottom 0.254: 40.31,42.56 v40.31,28.94
TXD  (via drill 0.3 pad 0.6)
  Top 0.203: IC6.32 56.25,46.47 v56.25,43.75 | IC5.14 56.08,38.9 v56.12,38.94
  Bottom 0.203: v56.12,38.94 56.09,38.97 56.25,39.12 v56.25,43.75
USB5V  (via drill 0.3 pad 0.6)
  Top 0.305: 16.31,38.06 C8.1 | IC3.20 v20.78,38.05 20.8,38.03 20.8,35.15 21.14,34.81 IC3.4 28.87,34.81 | R3.2 9.83,33.05 R4.2 9.84,35.29 9.84,37.95 9.7,38.09 10.56,38.09 C9.+ | v24.18,45.56 24.18,48.79 23.8,49.17 L1.1 | IC5.7 34.07,33.82 34.25,34 34.25,41.16 33.98,41.43 32.72,41.43 IC5.1 30.75,41.44 | 30.75,41.44 28.06,41.44 27.5,42 24.43,42 v24.18,41.75 | C15.1 30.75,41.44
  Top 0.406: IC3.20 16.31,38.06 10.61,38.06 C9.+ | 28.87,34.81 C11.1
  Bottom 0.305: v24.18,45.56 v24.18,41.75 24.18,38.46 23.81,38.07 22.7,38.07 v20.78,38.05
USBDM
  Top 0.203: IC1.P$6 17.71,45.81 17.4,45.5 17.4,42.4 | 18.77,40.72 17.88,40.72 17.4,41.2 17.4,42.4 | C5.1 17.4,42.4
  Top 0.305: 18.77,40.72 IC3.16
USBDP
  Top 0.203: IC1.P$4 21.72,43.91 22.28,43.35 22.28,43.33 | 22.28,43.33 22.28,42.2 21.42,41.33 21.4,41.32 21.4,41.31 IC3.15 | C4.1 22.29,43.34 22.28,43.33
VCCIO  (via drill 0.3 pad 0.6)
  Top 0.203: IC13.34 47.88,27.12 47.75,27.25 v47.75,28 | C22.1 49.93,60.07 49.25,60.75 R7.2 | PDI.2 62.43,44.5
  Top 0.254: IC13.6 IC13.7 64.4,23.12 v64.53,22.99 | R10.2 R24.2 R22.2 | R22.2 65.25,27.4 65.25,28.75 v65,29 | R22.2 R20.2 | IC13.23 55,30.94
  Top 0.305: IC5.10 36.94,33.81 v36.75,34 | IC5.16 38.31,42.5 38.31,42.9 C17.1 | v65,30.94 65.34,30.6 C34.1 67.57,30.85 67.57,32.1 IC12.5 | R13.1 33.69,20.02 34.12,20.46 34.12,23.5 34.58,23.95 IC14.5 35.65,24.3 C38.1 35.65,25.9 36.06,26.31 v36.5,26.31 C40.1 37.54,24.96 37.75,24.75 38.25,24.75 IC15.5 | C26.1 60.57,52.25 IC6.39
  Top 0.406: IC6.9 C22.1 C25.1 | IC6.9 | C23.1 45.95,50.65 IC6.19 49.12,50.65 49.71,51.24 49.71,51.85 50.17,52.31 52.91,52.31 53.07,52.16 | C24.1 55.17,44.44 55.42,44.69 IC6.31 55.42,50.26 54.74,50.94 53.83,50.94 53.07,51.7 53.07,52.16 | 53.07,52.16 53.01,52.25 | 53.01,52.25 v53.07,52.25 IC6.39 | IC6.9 50.63,54.6 51.39,53.83 52.61,53.83 53.01,53.28 53.01,52.25 | OSC1.P$4 61.34,48.27 62.09,47.52 C19.1 61.96,46.66 v60.72,46.66 v60.72,46.67 | CLKIN.1 7.07,30.84 36.59,30.84 v36.75,31.01 | v65,30.94 55,30.94 48.06,30.94 v48,31 | IC7.5 65.03,66.47 | 65.03,66.47 v65,66.5 | C21.1 63.93,66.47 65.03,66.47 | v36.69,46.25 36.69,46.44 37,46.75 44.82,46.75 44.9,46.67 | v36.75,42.75 38.06,42.75 38.31,42.5
  Top 0.61: v65,44.5 62.43,44.5 61.5,44.5 60.97,45.03 60.97,46.42 v60.72,46.67 | v47.01,46.67 44.9,46.67 C27.1
  Bottom 0.203: v36.75,31.01 36.75,26.5 36.5,26.25 v36.5,26.31 | v47.75,28 47.75,30.75 v48,31
  Bottom 0.254: v65,30.94 64.54,30.48 64.54,29 | v64.53,22.99 64.54,23 64.54,29 | 64.54,29 v65,29
  Bottom 0.406: v53.07,52.25 53.07,46.98 | 53.07,46.98 53.37,46.67 52.76,46.67 53.07,46.98 | v36.75,31.01 v36.75,34 36.69,34.06 36.69,42.69 v36.75,42.75 36.69,42.81 v36.69,46.25
  Bottom 0.61: 53.37,46.67 v60.72,46.67 | 52.76,46.67 v47.01,46.67 | v65,30.94 v65,44.5 v65,66.5

## Text on the board
tPlace: Licensed under the TAPR Open / Hardware License (www.tapr.org/OHL) / / Copyright 2021 Hardware Platform | Licensed under the TAPR Open Hardware / License (www.tapr.org/OHL) | www.cf-hw.org | Hardware / Platform | +5V | GND | 12V / Only! | GND | DO3 | DO2 | DO1 | + | DO0 | GND | DI0 | GND | harp analog input v1.0 | IN_A0 | IN_A1 | IN_A2 | IN_A3